# Altium PCB Copy of MacLayout.PcbDoc (part 1 of 2)
Units mil, origin at the board's own origin, x right, y up, seen from the top; angles counter-clockwise.
Board outline 5984.25 x 2047.24 mil, 4 copper layers (Top Layer, Int2 (Sign), Int3 (Sign), Bottom Layer), stack 58.312 mil thick; 135 components, 109 nets, 624 pads, 48 vias.
Unrouted connection lines stored in the file: 144.
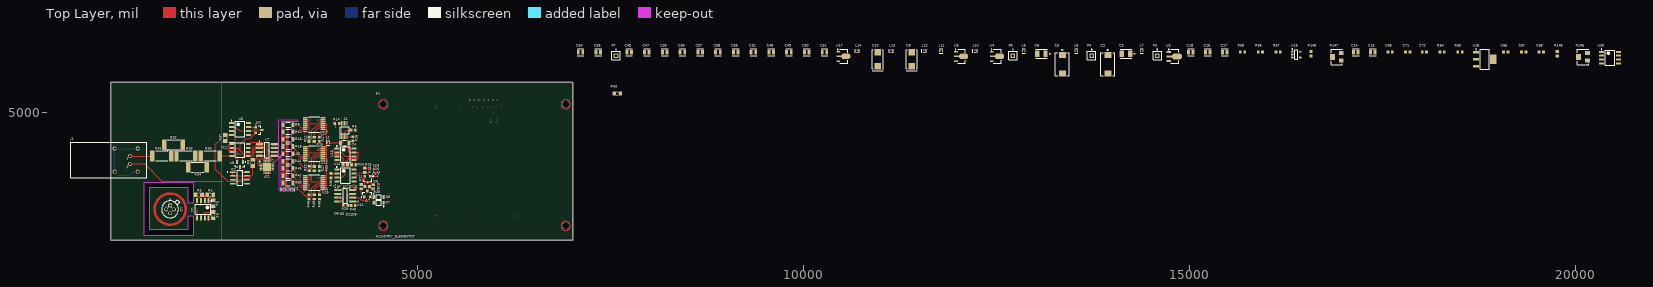
[diagram p0: Top Layer view]
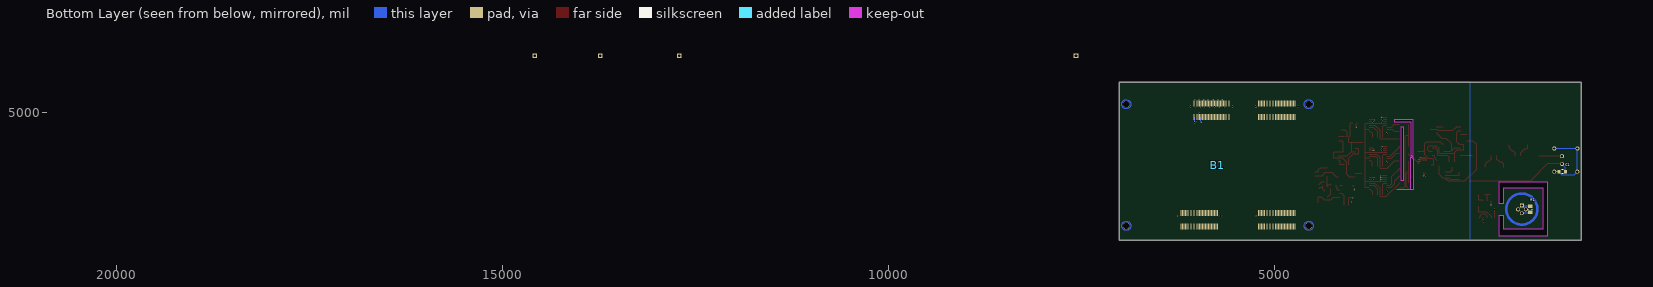
[diagram p1: Bottom Layer view, seen from below]
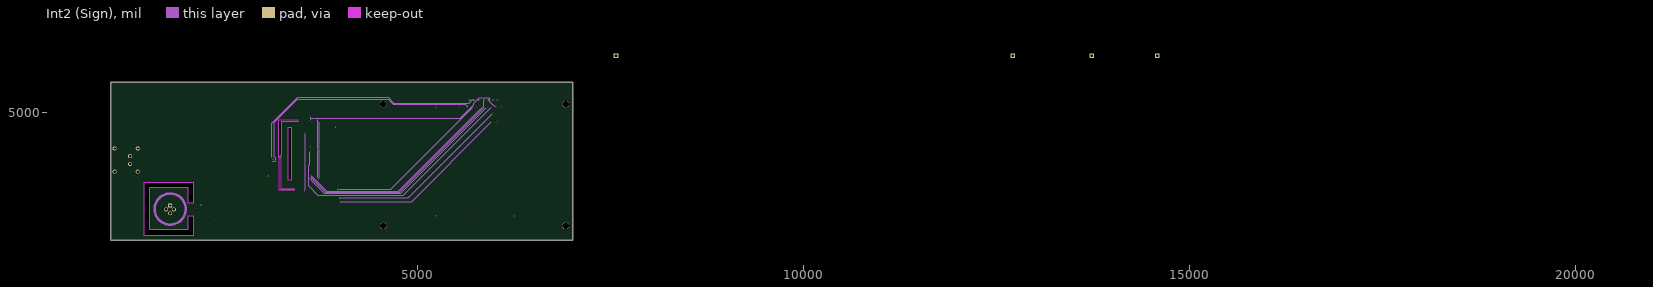
[diagram p2: Int2 (Sign)]
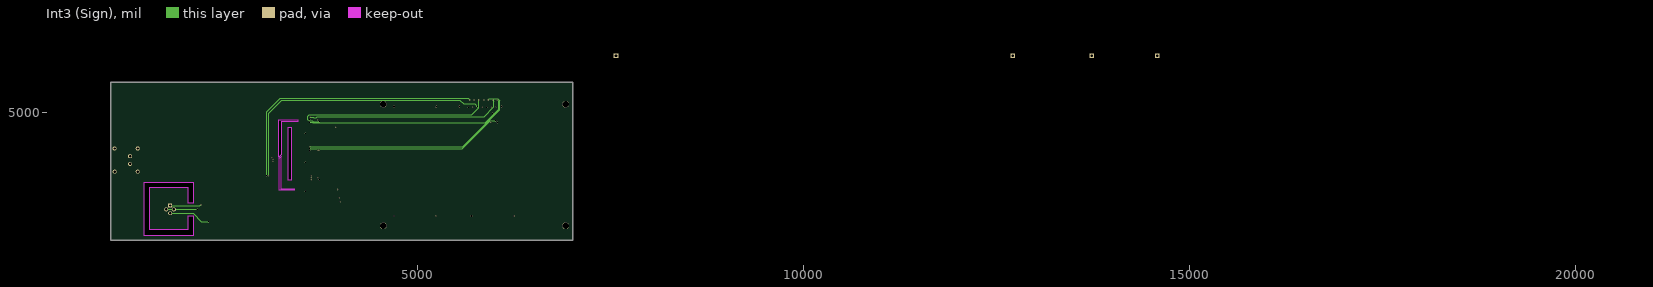
[diagram p3: Int3 (Sign)]

## Layer stack, top to bottom
Top Solder: solder mask 1, SM-001, Dk 4
Top Layer: signal copper 1.378
Dielectric 1: prepreg 2.8, PP-006, Dk 4.1
Dielectric 2: prepreg 2.8, PP-006, Dk 4.1
Dielectric 3: core 18, Core-035, Dk 4.7
Int2 (Sign): signal copper 1.378
Dielectric 4: prepreg 2.8, PP-006, Dk 4.1
Dielectric 5: prepreg 2.8, PP-006, Dk 4.1
Int3 (Sign): signal copper 1.378
Dielectric 6: core 18, Core-035, Dk 4.7
Dielectric 7: prepreg 2.8, PP-006, Dk 4.1
Dielectric 8: prepreg 2.8, PP-006, Dk 4.1
Bottom Layer: signal copper 1.378
Bottom Solder: solder mask 1, SM-001, Dk 4

## Board outline
1023.62,3346.46 7007.87,3346.46 7007.87,5393.7 1023.62,5393.7
cut-out: 3362.71,4809.97 3362.71,4120.2 3322.55,4120.2 3322.55,4809.97
cut-out: 3200.79,4421.26 3200.79,4905.51 3444.88,4905.51 3444.88,4881.89 3232.28,4881.89 3232.28,4452.76
cut-out: 3200.79,4397.64 3200.79,3996.06 3409.17,3996.06 3409.17,4007.87 3232.28,4007.87 3232.28,4429.13
cut-out: 2094.49,3822.83 2027.56,3822.83 2027.56,4027.56 1527.56,4027.56 1527.56,3484.25 2027.56,3484.25 2027.56,3665.35 2094.49,3665.35 2094.49,3405.51 1460.63,3405.51 1460.63,4098.43 2094.49,4098.43

## Design rules (kind name [scope] priority, off if disabled: settings)
Clearance [All] p1: gap=3.15 ignorepadtopadclearanceinfootprint=FALSE except(3.94: Arc-Arc Arc-Track Track-Track)
ComponentClearance [InComponent('B1')] p1: gap=0 collisioncheckmode=3 verticalgap=0 showdistances=FALSE
PlaneConnect [All] p1: planeconnectstyle=Direct reliefexpansion=20 reliefentries=4 reliefconductorwidth=10 reliefairgap=10
PolygonConnect [All] p1: connectstyle=Direct reliefconductorwidth=10 reliefentries=4 polygonreliefangle="90 Angle" airgapwidth=10
RoutingTopology [All] p1: topology=Daisy_Simple
RoutingVias [All] p1: holewidth=11.81 width=19.68 viastyle="Through Hole" minholewidth=11.81 minwidth=19.68 maxholewidth=27.99 maxwidth=50
SolderMaskExpansion [All] p1: expansion=4 istentingtop=FALSE
Width [All] p1: maxlimit=19.68 minlimit=3.94 preferedwidth=10
27 further rules are at their usual default settings.

## Classes and differential pairs
component class U_Vref: R1 R2 R3 R4 R5 U1 U2
component class U_PSU: C2 C3 C5 C6 C8 C10 C14 C15 C16 C17 C18 C32 C39 C45 C47 C48 C49 C50 C51 C54 C55 C56 C57 C58 C59 C66 C67 C68 C69 C71 C72 L7 L8 L9 L10 L11 L12 L13 L14 P3 P4 P5 P7 R54 R55 R56 R57 R58 R145 R146 R147 R148 U3 U4 U5 U17 U18 U19 U30
component class U_Frontend: C1 IC1 J1 Q1 Q2 R8 R31 R32 R33 R34 R35 R37 R43 U6 U7 U8
component class U_FPGA: B1
component class U_ADC_Core: C4 D5 D6 D7 D8 D9 D10 D11 D12 IC2 L1 L2 L3 Q6 Q7 R6 R9 R10 R12 R13 R14 R15 R16 R17 R18 R20 R22 R23 R24 R25 R26 R27 R28 R29 R30 R36 R40 R44 R45 R47 R48 R49 R50 S1 SS U10 U11 U12 U13 U14 U15

## Components (designator, comment, footprint, x,y, rotation, side; value= is the part's Value field where it differs from the comment)
B1 "ALCHITRY_ELEMENTNT" ELEMENT_NO_TOP 7015.75,5204.72 r180 top
C1 "CGA3E2X7R1H104K080AA" FP-CGA3E-0_3-0_1-IPC_A 1271.65,4232.28 r180 bottom
C2 "T491D106K025AT" FP-T491D-MFG 13940,5625 r90 top
C3 "T491B106K016AT" FP-T491B106K016AT-MFG 14175,5760 r0 top
C4 "C1206C331J5GACTU" FP-C1206C-EB-MFG 4055.12,4606.3 r180 top value="330 pF"
C5 "T491D106K025AT" FP-T491D-MFG 13350,5625 r90 top
C6 "T491B106K016AT" FP-T491B106K016AT-MFG 13080,5760 r0 top
C8 "T491C106K010AT" KEMT-T491-C_L 11400,5690 r90 top
C10 "T491C106K010AT" KEMT-T491-C_L 10960,5690 r90 top
C14 "100nF" FP-C0805C-DN-MFG 17150,5780 r0 top value="0.10 μF"
C15 "100nF" FP-C0805C-DN-MFG 17370,5780 r0 top value="0.10 μF"
C16 "100nF" FP-C0805C-DN-MFG 15235,5780 r0 top value="0.10 μF"
C17 "100nF" FP-C0805C-DN-MFG 15455,5780 r0 top value="0.10 μF"
C18 "100nF" FP-C0805C-DN-MFG 15015,5780 r0 top value="0.10 μF"
C32 "10nF" FP-C0805C-DN-MFG 9350,5780 r0 top value="0.10 μF"
C39 "10nF" FP-C0805C-DN-MFG 8200,5780 r0 top value="0.10 μF"
C45 "100nF" FP-C0805C-DN-MFG 7740,5780 r0 top value="0.10 μF"
C47 "100nF" FP-C0805C-DN-MFG 7970,5780 r0 top value="0.10 μF"
C48 "100nF" FP-C0805C-DN-MFG 9580,5780 r0 top value="0.10 μF"
C49 "100nF" FP-C0805C-DN-MFG 9810,5780 r0 top value="0.10 μF"
C50 "100nF" FP-C0805C-DN-MFG 10040,5780 r0 top value="0.10 μF"
C51 "100nF" FP-C0805C-DN-MFG 10270,5780 r0 top value="0.10 μF"
C54 "100nF" FP-C0805C-DN-MFG 7110,5780 r0 top value="0.10 μF"
C55 "100nF" FP-C0805C-DN-MFG 7340,5780 r0 top value="0.10 μF"
C56 "100nF" FP-C0805C-DN-MFG 8430,5780 r0 top value="0.10 μF"
C57 "100nF" FP-C0805C-DN-MFG 8660,5780 r0 top value="0.10 μF"
C58 "100nF" FP-C0805C-DN-MFG 8890,5780 r0 top value="0.10 μF"
C59 "100nF" FP-C0805C-DN-MFG 9120,5780 r0 top value="0.10 μF"
C66 "GRM188R71H103KA01D" CAPC1608X90X35ML10T15 19095,5785 r0 top
C67 "GRM188R71H103KA01D" CAPC1608X90X35ML10T15 19325,5785 r0 top
C68 "GRM188R71H103KA01D" CAPC1608X90X35ML10T15 19555,5785 r0 top
C69 "GRM188R71H103KA01D" CAPC1608X90X35ML10T15 17595,5785 r0 top
C71 "GRM188R71H103KA01D" CAPC1608X90X35ML10T15 17825,5785 r0 top
C72 "GRM188R71H103KA01D" CAPC1608X90X35ML10T15 18040,5785 r0 top
D5 "BAS716" ONSC-SOD-523-2-502-01_V 4018.11,4047.24 r180 top
D6 "BAS716" ONSC-SOD-523-2-502-01_V 3939.37,4047.24 r180 top
D7 "MMSZ4680T1G" ONSC-SOD-123-2-425-04_V 4496.06,3830.71 r180 top
D8 "MMSZ4680T1G" ONSC-SOD-123-2-425-04_V 4496.06,3905.51 r0 top
D9 "BAS716" ONSC-SOD-523-2-502-01_V 4177.17,4047.24 r180 top
D10 "BAS716" ONSC-SOD-523-2-502-01_V 4479.02,4201.29 r270 top
D11 "BAS716" ONSC-SOD-523-2-502-01_V 4096.85,4047.24 r180 top
D12 "BAS716" ONSC-SOD-523-2-502-01_V 4433.07,4200.79 r90 top
IC1 "JFE2140DR" SOIC127P600X175-8N 2699.6,4514.13 r0 top
IC2 "TMUX7234RRQR" QFN50P400X400X80-21N-D 3048.6,4294.79 r0 top
J1 "EPG.0B.302.HLN" EPG.0B.302.HLN 1225.59,4383.07 r180 top
L1 "LQW15ANR10J00D" FP-LQW15AN_00-W0_5-0_1-MFG 3381.61,4002.1 r270 top
L2 "LQW15ANR10J00D" FP-LQW15AN_00-W0_5-0_1-MFG 3840.63,4606.3 r0 top
L3 "LQW15ANR10J00D" FP-LQW15AN_00-W0_5-0_1-MFG 3263.5,4002.1 r90 top
L7 "LQW15ANR10J00D" FP-LQW15AN_00-W0_5-0_1-MFG 14380,5795 r0 top
L8 "LQW15ANR10J00D" FP-LQW15AN_00-W0_5-0_1-MFG 13530,5795 r0 top
L9 "LQW15ANR10J00D" FP-LQW15AN_00-W0_5-0_1-MFG 12850,5795 r0 top
L10 "LQW15ANR10J00D" FP-LQW15AN_00-W0_5-0_1-MFG 12220,5795 r90 top
L11 "LQW15ANR10J00D" FP-LQW15AN_00-W0_5-0_1-MFG 11780,5795 r0 top
L12 "LQW15ANR10J00D" FP-LQW15AN_00-W0_5-0_1-MFG 11560,5795 r90 top
L13 "LQW15ANR10J00D" FP-LQW15AN_00-W0_5-0_1-MFG 11135,5795 r90 top
L14 "LQW15ANR10J00D" FP-LQW15AN_00-W0_5-0_1-MFG 10695,5795 r90 top
P3 "Plug" PIN1 14580,5735 r0 top
P4 "Plug" PIN1 13730,5735 r0 top
P5 "Plug" PIN1 12710,5735 r0 top
P7 "Plug" PIN1 7570,5735 r0 top
Q1 "SSM2212RZ-R7" FP-R-8-IPC_C 2698.98,4153.24 r0 top
Q2 "MMBF4391LT1G" ONSC-SOT-23-3-318-08_V 2945.04,4773.16 r0 top
Q6 "MMBFJ309LT1G" ONSC-SOT-23-3-318-08_V 4351.38,4133.86 r270 top
Q7 "MMBFJ175LT1G" ONSC-SOT-23-3-318-08_V 4349.02,3943.09 r90 top
R1 "7K5" RESC2013X60X35ML10T20 1688.03,3744.96 r270 bottom
R2 "9K" RESC2013X60X35ML10T20 2313.99,3932.92 r0 top
R3 "20K" RESC2013X60X35ML10T20 2354.46,3670.87 r270 top
R4 "20K" RESC2013X60X35ML10T20 2353.34,3825.63 r270 top
R5 "20K" RESC2013X60X35ML10T20 2168.11,3933.63 r180 top
R6 "ERJ-3GEYJ202V" RESC1608X55X30ML15T15 4165.35,4771.65 r180 top
R8 "1K" RESC2013X60X35ML10T20 2866.14,4346.46 r270 top
R9 "10K" FP-RC1206-MFG 3322.55,4842.64 r0 top value=0Ω
R10 "40K" FP-RC1206-MFG 3322.55,4748.16 r0 top value=0Ω
R12 "ERJ-3GEYJ202V" RESC1608X55X30ML15T15 3595.02,4651.07 r270 top
R13 "640R" FP-RC1206-MFG 3322.55,4653.67 r0 top value=0Ω
R14 "ERJ-3GEYJ202V" RESC1608X55X30ML15T15 3955.71,4858.27 r180 top
R15 "ERJ-3GEYJ202V" RESC1608X55X30ML15T15 3729.97,4651.07 r270 top
R16 "ERJ-3GEYJ202V" RESC1608X55X30ML15T15 4165.35,4657.48 r90 top
R17 "ERJ-3GEYJ202V" RESC1608X55X30ML15T15 3661.95,4651.07 r270 top
R18 "6.24M" FP-RC1206-MFG 3322.55,4559.18 r0 top value=0Ω
R20 "ERJ-3GEYJ202V" RESC1608X55X30ML15T15 3597.77,4273.23 r270 top
R22 "ERJ-3GEYJ202V" RESC1608X55X30ML15T15 4270.84,4039.33 r270 top
R23 "ERJ-3GEYJ202V" RESC1608X55X30ML15T15 3729.94,4272.21 r270 top
R24 "ERJ-3GEYJ202V" RESC1608X55X30ML15T15 4063.98,4322.83 r180 top
R25 "ERJ-3GEYJ202V" RESC1608X55X30ML15T15 4172.81,4322.4 r180 top
R26 "ERJ-3EKF4220V" RESC1608X55X30ML15T15 4347.44,4039.37 r0 top
R27 "ERJ-3GEYJ202V" RESC1608X55X30ML15T15 3662.75,4272.21 r270 top
R28 "ERJ-3GEYJ202V" RESC1608X55X30ML15T15 4426.08,4038.41 r270 top
R29 "ERJ-3GEYJ202V" RESC1608X55X30ML15T15 4066.93,3795.28 r180 top
R30 "ERJ-3GEYJ202V" RESC1608X55X30ML15T15 3877.95,4181.1 r90 top
R31 "10K 2512" FP-CRCW2512-e3-MFG 1685.04,4437.01 r0 top
R32 "10K 2512" FP-CRCW2512-e3-MFG 1838.58,4582.68 r0 top
R33 "10K 2512" FP-CRCW2512-e3-MFG 2000,4437.01 r0 top
R34 "10K 2512" FP-CRCW2512-e3-MFG 2149.61,4291.34 r0 top
R35 "10K 2512" FP-CRCW2512-e3-MFG 2314.96,4437.01 r0 top
R36 "ERJ-3GEYJ202V" RESC1608X55X30ML15T15 4314.96,4251.97 r270 top
R37 "1K" RESC2013X60X35ML10T20 2507.87,4669.29 r270 top
R40 "ERJ-3GEYJ202V" RESC1608X55X30ML15T15 4165.35,3795.28 r180 top
R43 "1K" RESC2013X60X35ML10T20 7585,5245 r0 top
R44 "2.56M" FP-RC1206-MFG 3322.55,4370.2 r0 top value=0Ω
R45 "160K" FP-RC1206-MFG 3322.55,4275.72 r0 top value=0Ω
R46 "ERJ-3GEYJ202V" RESC1608X55X30ML15T15 3595.02,3905.28 r270 top
R47 "40K" FP-RC1206-MFG 3322.55,4181.23 r0 top value=0Ω
R48 "ERJ-3GEYJ202V" RESC1608X55X30ML15T15 3729.97,3905.28 r270 top
R49 "ERJ-3GEYJ202V" RESC1608X55X30ML15T15 3661.95,3905.28 r270 top
R50 "10K" FP-RC1206-MFG 3322.55,4086.74 r0 top value=0Ω
R54 "ERJ-3GEYJ202V" RESC1608X55X30ML15T15 18270,5785 r0 top
R55 "ERJ-3GEYJ202V" RESC1608X55X30ML15T15 18500,5785 r0 top
R56 "ERJ-3GEYJ202V" RESC1608X55X30ML15T15 15915,5785 r0 top
R57 "ERJ-3GEYJ202V" RESC1608X55X30ML15T15 16145,5785 r0 top
R58 "ERJ-3GEYJ202V" RESC1608X55X30ML15T15 15685,5785 r0 top
R145 "3224W-1-102E" FP-3224W-MFG 20095,5720 r0 top value=1kΩ
R146 "ERJ-3GEYJ202V" RESC1608X55X30ML15T15 19760,5760 r90 top
R147 "3224W-1-102E" FP-3224W-MFG 16905,5720 r0 top value=1kΩ
R148 "ERJ-3GEYJ202V" RESC1608X55X30ML15T15 16570,5760 r90 top
S1 "TMUX6122DGSR" SOP50P490X110-10N 4056.1,4772.52 r90 top
SS "50K" FP-RC1206-MFG 3322.55,4464.69 r0 top value=0Ω (schematic designator R19)
U1 "OPA2140AIDR" D0008A_M 2219.67,3745.9 r270 top
U2 "LM399AH#PBF" FP-H-4-05-08-1341-MFG 1794.33,3744.96 r90 top
U3 "L78L15ABUTR" SOT-89_N 14805,5725 r0 top
U4 "L79L15ACUTR" SOT-89_L 12505,5725 r0 top
U5 "L78L05ABUTR" SOT-89_L 12040,5725 r0 top
U6 "OPA140AID" D0008A_M 2699.6,4785.99 r0 top
U7 "LT1128CS8#PBF" LT-S8-8_M 3049.37,4514.13 r0 top
U8 "Vishay 2K Matched Resistor Network" MAXM-U3+2_L 2699.6,4325.72 r270 top
U10 "TMUX1133PWR" FP-PW0016A-MFG 3660.47,4842.64 r180 top
U11 "TMUX1133PWR" FP-PW0016A-MFG 3660.47,4466.32 r180 top
U12 "TL3016CDR" FP-D0008A-IPC_A 4062.46,3921.46 r180 top
U13 "OPA2140AIDR" D0008A_M 4064.78,4456.82 r0 top
U14 "OPA140AID" D0008A_M 4064.78,4183.79 r0 top
U15 "TMUX1133PWR" FP-PW0016A-MFG 3660.47,4090 r180 top
U17 "L79L05ABUTR" SOT-89_L 10515,5725 r0 top
U18 "LD1117S25TR" SOT-223_L 18820,5690 r0 top
U19 "TPS72325DBVT" DBV0005A_L 16380,5750 r0 top
U30 "OPA2140AIDR" D0008A_M 20445,5710 r0 top

## Footprints (in the part's own frame and the unit in brackets; to place one, negate y for a bottom-side part, rotate by r counter-clockwise, add the part's x,y. Pads: shape width x height; smd on the part's side, far side on the other; paste and mask are expansions set on the pad)
CAPC1608X90X35ML10T15 [mm] "Chip Capacitor, 2-Leads, Body 1.7x0.9mm, IPC Low Density"
  rect 0.95x1.05 smd: 1(-0.725,0) 2(0.725,0)
  body extent -0.85,-0.45 0.85,0.45, height 0.9
D0008A_M [mm] "SOIC, 8-Leads, Body 5x4mm, Pitch 1.27mm, IPC Low Density"
  rrect15% 1.65x0.65 smd: 1(-2.825,1.905) 2(-2.825,0.635) 3(-2.825,-0.635) 4(-2.825,-1.905) 5(2.825,-1.905) 6(2.825,-0.635) 7(2.825,0.635) 8(2.825,1.905)
  silkscreen extent -2.95,-2.5 1.6,2.91, body extent -3,-2.45 3,2.45, height 1.63
DBV0005A_L [mm] "SOT23, 5-Leads, Body 3.05x1.75mm, Pitch 0.95mm, IPC High Density"
  rrect18% 0.8x0.55 smd: 1(-1.275,0.95) 2(-1.275,0) 3(-1.275,-0.95) 4(1.275,-0.95) 5(1.275,0.95)
  silkscreen extent -1.4,-1.55 0.5,1.9, body extent -1.42,-1.46 1.42,1.46, height 1.08
ELEMENT_NO_TOP [mm]
  rect 0.25x2 smd far side: AB_1(20.5,38.3) AB_2(21,38.3) AB_3(21.5,38.3) AB_4(22,38.3) AB_5(22.5,38.3) AB_6(23,38.3) AB_7(23.5,38.3) AB_8(24,38.3) AB_9(24.5,38.3) AB_10(25,38.3) AB_11(25.5,38.3) AB_12(26,38.3) AB_13(26.5,38.3) AB_14(27,38.3) AB_15(27.5,38.3) AB_16(28,38.3) AB_17(28.5,38.3) AB_18(29,38.3) AB_19(29.5,38.3) AB_20(30,38.3) AB_21(30.5,38.3) AB_22(31,38.3) AB_23(31.5,38.3) AB_24(32,38.3) AB_25(32.5,38.3) AB_26(32.5,42.7) AB_27(32,42.7) AB_28(31.5,42.7) AB_29(31,42.7) AB_30(30.5,42.7) AB_31(30,42.7) AB_32(29.5,42.7) AB_33(29,42.7) AB_34(28.5,42.7) AB_35(28,42.7) AB_36(27.5,42.7) AB_37(27,42.7) AB_38(26.5,42.7) AB_39(26,42.7) AB_40(25.5,42.7) AB_41(25,42.7) AB_42(24.5,42.7) AB_43(24,42.7) AB_44(23.5,42.7) AB_45(23,42.7) AB_46(22.5,42.7) AB_47(22,42.7) AB_48(21.5,42.7) AB_49(21,42.7) AB_50(20.5,42.7) BB_1(46,38.3) BB_2(46.5,38.3) BB_3(47,38.3) BB_4(47.5,38.3) BB_5(48,38.3) BB_6(48.5,38.3) BB_7(49,38.3) BB_8(49.5,38.3) BB_9(50,38.3) BB_10(50.5,38.3) BB_11(51,38.3) BB_12(51.5,38.3) BB_13(52,38.3) BB_14(52.5,38.3) BB_15(53,38.3) BB_16(53.5,38.3) BB_17(54,38.3) BB_18(54.5,38.3) BB_19(55,38.3) BB_20(55.5,38.3) BB_21(56,38.3) BB_22(56.5,38.3) BB_23(57,38.3) BB_24(57.5,38.3) BB_25(58,38.3) BB_26(58,42.7) BB_27(57.5,42.7) BB_28(57,42.7) BB_29(56.5,42.7) BB_30(56,42.7) BB_31(55.5,42.7) BB_32(55,42.7) BB_33(54.5,42.7) BB_34(54,42.7) BB_35(53.5,42.7) BB_36(53,42.7) BB_37(52.5,42.7) BB_38(52,42.7) BB_39(51.5,42.7) BB_40(51,42.7) BB_41(50.5,42.7) BB_42(50,42.7) BB_43(49.5,42.7) BB_44(49,42.7) BB_45(48.5,42.7) BB_46(48,42.7) BB_47(47.5,42.7) BB_48(47,42.7) BB_49(46.5,42.7) BB_50(46,42.7) CB_1(24.5,2.3) CB_2(25,2.3) CB_3(25.5,2.3) CB_4(26,2.3) CB_5(26.5,2.3) CB_6(27,2.3) CB_7(27.5,2.3) CB_8(28,2.3) CB_9(28.5,2.3) CB_10(29,2.3) CB_11(29.5,2.3) CB_12(30,2.3) CB_13(30.5,2.3) CB_14(31,2.3) CB_15(31.5,2.3) CB_16(32,2.3) CB_17(32.5,2.3) CB_18(33,2.3) CB_19(33.5,2.3) CB_20(34,2.3) CB_21(34.5,2.3) CB_22(35,2.3) CB_23(35.5,2.3) CB_24(36,2.3) CB_25(36.5,2.3) CB_26(36.5,6.7) CB_27(36,6.7) CB_28(35.5,6.7) CB_29(35,6.7) CB_30(34.5,6.7) CB_31(34,6.7) CB_32(33.5,6.7) CB_33(33,6.7) CB_34(32.5,6.7) CB_35(32,6.7) CB_36(31.5,6.7) CB_37(31,6.7) CB_38(30.5,6.7) CB_39(30,6.7) CB_40(29.5,6.7) CB_41(29,6.7) CB_42(28.5,6.7) CB_43(28,6.7) CB_44(27.5,6.7) CB_45(27,6.7) CB_46(26.5,6.7) CB_47(26,6.7) CB_48(25.5,6.7) CB_49(25,6.7) CB_50(24.5,6.7) DB_1(46,2.3) DB_2(46.5,2.3) DB_3(47,2.3) DB_4(47.5,2.3) DB_5(48,2.3) DB_6(48.5,2.3) DB_7(49,2.3) DB_8(49.5,2.3) DB_9(50,2.3) DB_10(50.5,2.3) DB_11(51,2.3) DB_12(51.5,2.3) DB_13(52,2.3) DB_14(52.5,2.3) DB_15(53,2.3) DB_16(53.5,2.3) DB_17(54,2.3) DB_18(54.5,2.3) DB_19(55,2.3) DB_20(55.5,2.3) DB_21(56,2.3) DB_22(56.5,2.3) DB_23(57,2.3) DB_24(57.5,2.3) DB_25(58,2.3) DB_26(58,6.7) DB_27(57.5,6.7) DB_28(57,6.7) DB_29(56.5,6.7) DB_30(56,6.7) DB_31(55.5,6.7) DB_32(55,6.7) DB_33(54.5,6.7) DB_34(54,6.7) DB_35(53.5,6.7) DB_36(53,6.7) DB_37(52.5,6.7) DB_38(52,6.7) DB_39(51.5,6.7) DB_40(51,6.7) DB_41(50.5,6.7) DB_42(50,6.7) DB_43(49.5,6.7) DB_44(49,6.7) DB_45(48.5,6.7) DB_46(48,6.7) DB_47(47.5,6.7) DB_48(47,6.7) DB_49(46.5,6.7) DB_50(46,6.7)
  round 2.2 hole 2.2 unplated: MH1(2.5,2.5) MH2(2.5,42.5) MH3(62.5,42.5) MH4(62.5,2.5)
  round 0.55 hole 0.55 unplated: MH5(58.95,39.25) MH6(45.05,39.25) MH7(33.45,39.25) MH8(19.55,39.25) MH9(58.95,3.25) MH10(45.05,3.25) MH11(37.45,3.25) MH12(23.55,3.25)
  Top Layer circle w0.254: c2.5,2.5 r1.5
  Top Layer circle w0.254: c2.5,42.5 r1.5
  Top Layer circle w0.254: c62.5,42.5 r1.5
  Top Layer circle w0.254: c62.5,2.5 r1.5
  Bottom Layer circle w0.254: c62.5,2.5 r1.5
  Bottom Layer circle w0.254: c62.5,42.5 r1.5
  Bottom Layer circle w0.254: c2.5,42.5 r1.5
  Bottom Layer circle w0.254: c2.5,2.5 r1.5
EPG.0B.302.HLN [mil] "Socket, Female, Height 11.7 mm, Through hole"
  round 52 hole 32: 1(-50,-50) 2(-50,50) 4(-150,-150) 5(150,-150) 6(150,150) 7(-150,150)
  silkscreen extent -268,-230 717,231, body extent -259,-230 725,230, height 500
FP-3224W-MFG [mm]
  rect 1.6x1.3 smd paste+0 mask+0: 1(1.45,-1.25) 3(1.45,1.25)
  rect 1.6x2 smd paste+0 mask+0: 2(-1.45,0)
  silkscreen extent -1.88,-2.52 1.88,2.52, body extent -2.35,-2.63 2.35,2.63, height 0.25
FP-C0805C-DN-MFG [mm]
  rect 0.95x1.35 smd paste+0 mask+0: 1(-0.75,0) 2(0.75,0)
  silkscreen extent -1.1,-1.07 1.1,1.07, body extent -1.4,-0.85 1.4,0.85, height 0.25
FP-C1206C-EB-MFG [mm]
  rect 0.95x1.7 smd paste+0 mask+0: 1(-1.4,0) 2(1.4,0)
  silkscreen extent -0.55,-0.9 0.55,0.9, body extent -2,-1 2,1, height 0.25
FP-CGA3E-0_3-0_1-IPC_A [mm]
  rect 0.956x1.206 smd paste+0 mask+0: 1(-1.025,0) 2(1.025,0)
  silkscreen extent -0.25,-0.6 0.25,0.6, body extent -0.8,-0.4 0.8,0.4, height 1.1
FP-CRCW2512-e3-MFG [mm]
  rect 1.45x3.5 smd paste+0 mask+0: 1(-3.1,0) 2(3.1,0)
  silkscreen extent -2,-1.65 2,1.65, body extent -3.92,-1.85 3.93,1.85, height 0.25
FP-D0008A-IPC_A [mil]
  rect 97.21x24.49 smd paste+0 mask+0: 1(-95.02,75)
  rrect100% 97.21x24.49 smd paste+0 mask+0: 2(-95.02,25) 3(-95.02,-25) 4(-95.02,-75) 5(95.02,-75) 6(95.02,-25) 7(95.02,25) 8(95.02,75)
  silkscreen extent -170,-97 27,97, body extent -163,-116 163,116, height 10
FP-H-4-05-08-1341-MFG [mm]
  rect 1.3x1.3 hole 0.8 paste-1000 mask+0: 1(1.27,0)
  round 1.3 hole 0.8 paste-1000 mask+0: 2(0,1.27) 3(-1.27,0) 4(0,-1.27)
  silkscreen extent -2.78,-3.24 3.37,2.78, body extent -2.88,-3.34 3.34,2.88, height 0.25
FP-LQW15AN_00-W0_5-0_1-MFG [mm]
  rect 0.35x0.65 smd paste+0 mask+0: 1(-0.425,0) 2(0.425,0)
  silkscreen extent -0.55,-0.71 0.55,0.7, body extent -0.7,-0.43 0.7,0.43, height 0.25
FP-PW0016A-MFG [mm]
  rrect22% 1.5x0.45 smd paste+0 mask+0: 1(-2.9,2.275) 2(-2.9,1.625) 3(-2.9,0.975) 4(-2.9,0.325) 5(-2.9,-0.325) 6(-2.9,-0.975) 7(-2.9,-1.625) 8(-2.9,-2.275) 9(2.9,-2.275) 10(2.9,-1.625) 11(2.9,-0.975) 12(2.9,-0.325) 13(2.9,0.325) 14(2.9,0.975) 15(2.9,1.625) 16(2.9,2.275)
  silkscreen extent -4.38,-2.55 1.78,2.55, body extent -3.75,-2.8 3.75,2.8, height 0.25
FP-R-8-IPC_C [mil]
  rect 73.78x21.34 smd paste+0 mask+0: 1(-91.18,75)
  rrect100% 73.78x21.34 smd paste+0 mask+0: 2(-91.18,25) 3(-91.18,-25) 4(-91.18,-75) 5(91.18,-75) 6(91.18,-25) 7(91.18,25) 8(91.18,75)
  silkscreen extent -166,-96 35,96, body extent -132,-100 132,100, height 10
FP-RC1206-MFG [mm]
  rect 1x1.5 smd paste+0 mask+0: 1(-1.6,0) 2(1.6,0)
  silkscreen extent -0.72,-0.85 0.72,0.85, body extent -2.2,-0.95 2.2,0.95, height 0.25
FP-T491B106K016AT-MFG [mm]
  rect 1.42x2.13 smd paste+0 mask+0: 1(-1.35,0) 2(1.35,0)
  silkscreen extent -1.85,-1.5 3,1.5, body extent -2.18,-1.62 2.18,1.62, height 0.25
FP-T491D-MFG [mm]
  rect 1.99x2.33 smd paste+0 mask+0: 1(-3.01,0) 2(3.01,0)
  silkscreen extent -3.8,-2.3 5,2.3, body extent -4.13,-2.42 4.13,2.42, height 0.25
KEMT-T491-C_L [mm] "Molded Capacitor, 2-Leads, Body 6.30x3.50mm, IPC High Density"
  rect 2.2x2.15 smd: 1(-2.275,0) 2(2.275,0)
  silkscreen extent -3.87,-1.75 3.15,1.75, body extent -3.15,-1.75 3.15,1.75, height 2.79
LT-S8-8_M [mm] "SOIC, 8-Leads, Body 4.9x3.9mm, Pitch 1.27mm, IPC Low Density"
  oval 2.5x0.7 smd: 1(-2.45,1.905) 2(-2.45,0.635) 3(-2.45,-0.635) 4(-2.45,-1.905) 5(2.45,-1.905) 6(2.45,-0.635) 7(2.45,0.635) 8(2.45,1.905)
  silkscreen extent -2.57,-2.5 0.8,2.93, body extent -2,-2.5 2,2.5, height 1.76
MAXM-U3+2_L [mm] "SOT23, 3-Leads, Body 2.92x1.3mm, Pitch 0.95mm, IPC High Density"
  rect 1.3x0.6 smd: 1(-0.85,0.95) 2(-0.85,-0.95) 3(0.85,0)
  silkscreen extent -0.97,-1.5 0.7,1.93, body extent -0.7,-1.52 0.7,1.52, height 1.12
ONSC-SOD-123-2-425-04_V [mm] "SOD, 2-Leads, Body 2.69x1.6mm"
  rect 0.91x1.22 smd: 1(-1.635,0) 2(1.635,0)
  silkscreen extent -1.76,-0.8 0.78,1.28, body extent -1.35,-0.8 1.35,0.8, height 1.35
ONSC-SOD-523-2-502-01_V [mm] "SOD, 2-Leads, Body 1.2x0.8mm"
  rect 0.48x0.4 smd: 1(-0.66,0) 2(0.66,0)
  silkscreen extent -0.75,-0.4 0.07,0.65, body extent -0.6,-0.4 0.6,0.4, height 0.7
ONSC-SOT-23-3-318-08_V [mm] "SOT23, 3-Leads, Body 2.92x1.3mm, Pitch 0.95mm"
  rect 0.9x0.8 smd: 1(-1,0.95) 2(-1,-0.95) 3(1,0)
  silkscreen extent -1.12,-1.46 0.65,2.02, body extent -0.65,-1.46 0.65,1.46, height 1.11
PIN1 [mm] "Connector; Plug"
  rect 1.5x1.5 hole 0.9: 1(0,0)
  silkscreen extent -1.4,-1.4 1.4,2.17
QFN50P400X400X80-21N-D [mm]
  rect 0.85x0.3 smd: 1(-1.95,1) 2(-1.95,0.5) 3(-1.95,0) 4(-1.95,-0.5) 5(-1.95,-1) 11(1.95,-1) 12(1.95,-0.5) 13(1.95,0) 14(1.95,0.5) 15(1.95,1)
  rect 0.3x0.85 smd: 6(-1,-1.95) 7(-0.5,-1.95) 8(0,-1.95) 9(0.5,-1.95) 10(1,-1.95) 16(1,1.95) 17(0.5,1.95) 18(0,1.95) 19(-0.5,1.95) 20(-1,1.95)
  rect 2.6x2.6 smd: 21(0,0)
  silkscreen extent -2.5,1.63 -2.25,1.87, body extent -2,-2 2,2, height 0.8
RESC1608X55X30ML15T15 [mm] "Chip Resistor, 2-Leads, Body 1.60x0.80mm, IPC Low Density"
  rect 0.9x1.05 smd: 1(-0.725,0) 2(0.725,0)
  body extent -0.87,-0.48 0.87,0.48, height 0.55
RESC2013X60X35ML10T20 [mm] "Chip Resistor, 2-Leads, Body 2.1x1.35mm, IPC Low Density"
  rect 1.2x1.45 smd: 1(-1,0) 2(1,0)
  silkscreen extent -0.1,-0.63 0.1,0.63, body extent -1.05,-0.68 1.05,0.67, height 0.6
SOIC127P600X175-8N [mm]
  rect 1.525x0.65 smd: 1(-2.712,1.905) 2(-2.712,0.635) 3(-2.712,-0.635) 4(-2.712,-1.905) 5(2.712,-1.905) 6(2.712,-0.635) 7(2.712,0.635) 8(2.712,1.905)
  silkscreen extent -3.47,-2.45 1.6,2.58, body extent -3,-2.45 3,2.45, height 1.75
SOP50P490X110-10N [mm]
  rect 1.4x0.3 smd: 1(-2.2,1) 2(-2.2,0.5) 3(-2.2,0) 4(-2.2,-0.5) 5(-2.2,-1) 6(2.2,-1) 7(2.2,-0.5) 8(2.2,0) 9(2.2,0.5) 10(2.2,1)
  silkscreen extent -2.9,-1.5 1.15,1.5, body extent -2.46,-1.5 2.46,1.5, height 1.1
SOT-89_L [mm] "SOT89, 3-Leads, Body 4.5x2.4 mm, Pitch 1.5mm, Lead Span 4.1mm, IPC High Density"
  rect 1.2x0.5 smd: 1(-1.7,1.5) 3(-1.7,-1.5)
  rect 1.6x0.5 smd: 2(-1.5,0)
  oct 3x1.8 smd: 2(0.8,0)
  silkscreen extent -1.97,-2.3 1.4,2.42, body extent -1.2,-2.3 1.4,2.3, height 1.6
SOT-89_N [mm] "SOT89, 3-Leads, Body 4.5x2.4 mm, Pitch 1.5mm, Lead Span 4.1mm, IPC Medium Density"
  rect 1.4x0.6 smd: 1(-1.9,1.5) 3(-1.9,-1.5)
  rect 1.8x0.6 smd: 2(-1.7,0)
  oct 3.2x1.9 smd: 2(0.8,0)
  silkscreen extent -2.07,-2.3 1.3,2.47, body extent -1.3,-2.3 1.3,2.3, height 1.6
SOT-223_L [mm] "SOT223, 4-Leads, Body 6.5x3.5mm, Pitch 2.3mm, Lead Span 7mm, IPC High Density"
  rect 2.1x0.9 smd: 1(-2.85,2.3) 2(-2.85,0) 3(-2.85,-2.3)
  rect 2.1x3.2 smd: 4(2.85,0)
  silkscreen extent -2.97,-3.35 1.5,3.42, body extent -1.85,-3.35 1.85,3.35, height 1.8

## Part data
B1: Package=ELEMENT_NO_TOP, DeviceName=NT, DeviceSetName=ALCHITRY_ELEMENT, GateName_1=A, GateName_2=B, GateName_3=C, GateName_4=D, LibraryName=alchitry_elements, SymbolName_1=FE25-2, SymbolName_2=FE25-2, SymbolName_3=FE25-2, SymbolName_4=FE25-2
C1: library part CMP-2000-07546-2, "Cap Ceramic 100nF 50V X7R 10% Pad SMD 0603 +125°C Automotive T/R", Capacitance=100nF, Case Code (Imperial)=0603, Case Code (Metric)=1608, Dielectric=X7R, Max Operating Temperature=125°C, Min Operating Temperature=-55°C, Package Quantity=1, Ratings=AEC-Q200, Tolerance=10%, Voltage=50V, Case/Package=0603, Composition=Ceramic, Depth=0.8mm, Height=0.8mm, Lead Free="Lead Free", Length=1.6mm, Mount="Surface Mount", Packaging="Tape and Reel", Radiation Hardening=No, REACH SVHC="No SVHC", Termination=SMD/SMT, Thickness=0.035inch, Voltage Rating=50V, Voltage Rating (DC)=50V, Weight=7.1E-05oz, Width=0.8mm
C2 C5: library part CMP-2000-07200-2, "CAP TANT 10UF 10% 25V 2917", Capacitance=10uF, Case Code (Imperial)=2917, Case Code (Metric)=7343, Dielectric Material=Tantalum, ESR (Equivalent Series Resistance)=1R, Leakage Current=2.5uA, Max Operating Temperature=125°C, Min Operating Temperature=-55°C, Package Quantity=1, Ripple Current=387mA, Tolerance=20%, Voltage=25V, Case/Package=2917, Depth=4.3mm, Dissipation Factor=6%, Features="General Purpose", Height=2.8mm, Height - Seated (Max)=0.122inch, Lead Free="Lead Free", Length=7.3mm, Life (Hours)=2000Hour, Mount="Surface Mount", Number of Pins=2, Packaging="Tape and Reel", Polarity=Polar, Radiation Hardening=No, REACH SVHC="No SVHC", Termination=SMD/SMT, Voltage Rating=25V, Voltage Rating (DC)=25V, Width=4.3mm
C3 C6: library part CMP-03017-000012-1, "CAP TANT 10UF 10% 16V 1411", Capacitance=10uF, Case Code (Imperial)=1411, Case Code (Metric)=3528, Dielectric Material=Tantalum, ESR (Equivalent Series Resistance)=2.8R, Leakage Current=1.6uA, Max Operating Temperature=125°C, Min Operating Temperature=-55°C, Package Quantity=1, Ripple Current=174mA, Tolerance=10%, Voltage=16V, Case/Package=1411, Depth=2.8mm, Dissipation Factor=6%, Features="General Purpose", Height=1.9mm, Height - Seated (Max)=0.083inch, Lead Free="Lead Free", Lead Pitch=1.9mm, Length=3.5mm, Life (Hours)=2000Hour, Mount="Surface Mount", Number of Pins=2, Packaging="Tape and Reel", Polarity=Polar, REACH SVHC="No SVHC", RoHS Compliant=Yes, Termination=SMD/SMT, Voltage Rating=16V, Voltage Rating (DC)=16V, Width=0.11inch
C4: library part CMP-03020-027730-1, "CAP CER 330PF 50V 5% NP0 1206", Capacitance="330 pF", Manufacturer=KEMET, Package=C1206C-EB, Temperature="-55°C to +150°C", Temperature Characteristic=C0G, Temperature Coefficient=15%, Temperature Range High=+150°C, Temperature Range Low=-55°C, Tolerance=0.05, Voltage Rating="50 V", Automotive=Yes, Automotive Grade="Grade 0", Category=Cap, ComponentLink2Description=Datasheet, ComponentLink2URL=https://content.kemet.com/datasheets/KEM_C1007_X8R_ULTRA_150C_SMD.pdf, Device Class L1="Passive Components", Device Class L2=Capacitors, Device Class L3="Ceramic Capacitors", Digikey Description="CAP CER 330PF 50V 5% NP0 1206", Height=0.88mm, Ipc Land Pattern Name=CAPC320160X78, Lead Free=Yes, Manufacturer Part Number=C1206C331J5GACTU, Material=Ceramic, Mouser Description="Multilayer Ceramic Capacitors MLCC - SMD/SMT 50volts 330pF C0G 5%", Octopart=https://octopart.com/c1206c331j5gactu-kemet-3859988, RoHS=TRUE
C8 C10: library part CMP-2000-07196-1, "Tantalum Surface Mount Capacitor, 10 uF, +/- 10%, 10 V, -55 to 125 degC, 2-Pin SMD, RoHS, Tape and Reel", Capacitance=10µF, Capacitance Tolerance=±10%, Capacitor Case Style=2312^6032Metric], Capacitor Terminals=SMD, Manufacturer=Kemet, Operating Temperature Range=-55°Cto+125°C, Package Description="2-Pin Surface Mount Device, Body 6 x 3.2 mm", Package Reference=T491-C, Voltage Rating=10V, Datasheet URL=http://www.kemet.com/Lists/ProductCatalog/Attachments/254/KEM_T2005_T491.pdf, Datasheet Version=06/2016, ESR=1.8ohm, Lead Spacing=–, Manufacturer URL=http://www.kemet.com/, Mounting Technology=SurfaceMount, MSL=MSL1-Unlimited, SVHC=–
C14 C15 C16 C17 C18 C32 C39 C45 C47 C48 C49 C50 C51 C54 C55 C56 C57 C58 C59: library part CMP-2007-00279-2, "CAP CER 0.1UF 50V X7R 0805", Capacitance="0.10 μF", Manufacturer=KEMET, Manufacturer Part Number=C0805C104K5RACTU, Package=C0805C-DN, Temperature="-55°C to +125°C", Temperature Characteristic=X7R, Temperature Coefficient=30ppm/°C, Temperature Range High=+125°C, Temperature Range Low=-55°C, Tolerance=0.1, Voltage Rating="50 V", Automotive=No, Category=Cap, ComponentLink2Description=Datasheet, ComponentLink2URL=https://content.kemet.com/datasheets/KEM_C1003_C0G_SMD.pdf, Device Class L1="Passive Components", Device Class L2=Capacitors, Device Class L3="Ceramic Capacitors", Digikey Description="CAP CER 0.1UF 50V X7R 0805", Height=0.88mm, Ipc Land Pattern Name=CAPC200125X78, Lead Free=Yes, Material=Ceramic, Mouser Description="Cap Ceramic 0.1uF 50V X7R 10% SMD 2.0 x 1.2 mm 125 C Paper T/R", Octopart=https://octopart.com/c0805c104k5ractu-kemet-143926, RoHS=TRUE
C66 C67 C68 C69 C71 C72: library part CMP-2100-03642-1, "Chip Capacitor, 10 nF, +/- 10%, 50 V, -55 to 125 degC, 0603 (1608 Metric), RoHS, Tape and Reel", Capacitance=10nF, Case Code (Imperial)=0603, Case Code (Metric)=1608, Dielectric=X7R, Dielectric Material=Ceramic, Insulation Resistance=10GR, Manufacturer=Murata, Max Operating Temperature=125degC, Min Operating Temperature=-55degC, Package Description="2-Pin Surface Mount Device, Body 1.6 x 0.8 mm", Package Quantity=1, Tolerance=10%, Voltage=50V, Case/Package=0603, Datasheet URL=http://search.murata.co.jp/Ceramy/image/img/A01X/G101/ENG/GRM188R71H103KA01-01.pdf, Datasheet Version=42401.0, Depth=0.8mm, Height=0.8mm, Lead Free=LeadFree, Length=1.6mm, Manufacturer URL=http://www.murata.com/, Material=Ceramic, Mount=SurfaceMount, Number of Pins=2, Package Reference=0603, Packaging=TapeandReel, REACH SVHC=Unknown, RoHSCompliant=True, Termination=SMD/SMT, Thickness=0.035inch, Voltage Rating=50V, Voltage Rating (DC)=50V, Width=0.031inch
D5 D6 D9 D10 D11 D12: library part CMP-1055-00490-1, "Schottky Barrier Diode, 2-Pin SOD-523, Pb-Free, Tape and Reel", Manufacturer="On Semiconductor", PartNumber=BAT54XV2T5G, ComponentLink1Description="Manufacturer URL", ComponentLink1URL=http://www.onsemi.com/, ComponentLink2Description=Datasheet, ComponentLink2URL=http://www.onsemi.cn/pub_link/Collateral/BAT54XV2T1-D.PDF, ComponentLink3Description="Package Specification", ComponentLink3URL=http://www.onsemi.com/pub_link/Collateral/502-01.PDF, Configuration=Single, DatasheetVersion="Rev. 8", IFSM Max (A)=0.6, Mounting Technology="Surface Mount", PackageDescription="2-Pin SOD, Body 1.2 x 0.8 mm", PackageReference=SOD-523-2-502-01, PackageVersion="Rev. E, 09/2010", Packing="Tape and Reel", RoHS=TRUE, trr Max (ns)=5
D7 D8: library part CMP-1060-00604-1, "Zener Voltage Regulator, 500 mW, 2-Pin SOD-123, Pb-Free, Tape and Reel", Manufacturer="On Semiconductor", ComponentLink1Description="Manufacturer URL", ComponentLink1URL=http://www.onsemi.com/, ComponentLink2Description=Datasheet, ComponentLink2URL=http://www.onsemi.com/pub_link/Collateral/MMSZ4678T1-D.PDF, ComponentLink3Description="Package Specification", ComponentLink3URL=http://www.onsemi.com/pub_link/Collateral/425-04.PDF, DatasheetVersion="Rev. 9", Mounting Technology="Surface Mount", P Max (W)=0.5, PackageDescription="2-Pin SOD, Body 1.6 x 2.69 mm", PackageReference=SOD-123-2-425-04, PackageVersion="Rev. G, 10/2009", Packing="Tape and Reel", PartNumber=MMSZ4680T1G, RoHS=Pb-Free, VZ Typ (V)=2.2
IC1: "Integrated Circuit", Manufacturer_Name="Texas Instruments", Mouser Part Number=595-JFE2140DR, Datasheet Link=https://www.ti.com/lit/ds/symlink/jfe2140.pdf?ts=1633964558921, Height=1.75mm, Manufacturer_Part_Number=JFE2140DR, Mouser Price/Stock=https://www.mouser.co.uk/ProductDetail/Texas-Instruments/JFE2140DR?qs=A6eO%252BMLsxmQVeRIGZCabaw%3D%3D
IC2: "Integrated Circuit", Manufacturer_Name="Texas Instruments", Mouser Part Number=595-TMUX7234RRQR, Datasheet Link=https://www.ti.com/lit/gpn/tmux7234, Height=0.8mm, Manufacturer_Part_Number=TMUX7234RRQR, Mouser Price/Stock=https://www.mouser.co.uk/ProductDetail/Texas-Instruments/TMUX7234RRQR?qs=pBJMDPsKWf2ane92Zx3aRA%3D%3D
J1: library part CMP-1505-00295-1, "Elbow receptacle for printed circuit (solder or screw fixing), Key (G), 0B series, Multipole Type with 2 Contacts", Manufacturer=LEMO, Rated Current(A)=6, AWG=22, ComponentLink1Description="Manufacturer URL", ComponentLink1URL=http://www.lemo.com, ComponentLink2Description=Datasheet, ComponentLink2URL=http://intra.lemo.ch/catalog/ROW/UK_English/unipole_multipole.pdf, Contact Diameter="0.9 mm", DatasheetVersion=Jun-14, Number of contacts=2, PackageDescription="Elbow receptacle for printed circuit (solder or screw fixing), Key(G) for Printed Circuit", PackageReference=EPG.0B.302.HLN, PartNumber=EPG.0B.302.HLN
L1 L2 L3 L7 L8 L9 L10 L11 L12 L13 L14: library part CMP-06042-005024-1, "Wire Wound RF Inductor 100nH ±5% 120mA 2.52Ω 0402 (1005)", Case Code (Imperial)=0402, Case Code (Metric)=1005, Current Rating=120mA, DC Resistance (DCR)=2.52R, Inductance=100nH, Inductance Tolerance=5%, Max Operating Temperature=125°C, Min Operating Temperature=-55°C, Package Quantity=10000, Self Resonant Frequency=1.5GHz, Test Frequency=100MHz, Case/Package=0402, Core Material=Air, DC Current=120mA, Depth=0.6mm, Height=0.5mm, Lead Free="Lead Free", Length=1mm, Max DC Current=120mA, Military Standard=Not, Mount="Surface Mount", Number of Pins=2, Packaging="Tape and Reel", Radiation Hardening=No, REACH SVHC="No SVHC", Shielding=Unshielded, Termination=SMD/SMT, Tolerance=5%, Weight=2.8E-05oz, Width=0.5mm
Q1: library part CMP-09180-000002-1, "TRANS 2NPN 40V 0.02A 8SOIC", Case/Package=SOIC, Collector Base Voltage (VCBO)=40V, Collector Emitter Breakdown Voltage=45V, Collector-emitter Voltage-Max=800mV, Frequency=200MHz, Max Collector Current=20mA, Max Operating Temperature=85°C, Max Power Dissipation=500mW, Min Operating Temperature=-40°C, Package Quantity=1000, Transition Frequency=450MHz, Collector Emitter Voltage (VCEO)=40V, Contact Plating=Tin, Element Configuration=Dual, Lead Free="Contains Lead", Max Breakdown Voltage=40V, Mount="Surface Mount", Number of Elements=2, Number of Pins=8, Packaging="Tape and Reel", Polarity=NPN, Radiation Hardening=No, RoHS Compliant=Yes, Series=SSM2212
Q2: library part CMP-1062-00030-1, "JFET Switching Transistor, N-Channel, 3-Pin SOT-23, Pb-Free, Tape and Reel", Manufacturer="On Semiconductor", Channel Polarity="N Channel", Ciss Max (pF)=14, ComponentLink1Description="Manufacturer URL", ComponentLink1URL=http://www.onsemi.com/, ComponentLink2Description=Datasheet, ComponentLink2URL=http://www.onsemi.com/pub_link/Collateral/MMBF4391LT1-D.PDF, ComponentLink3Description="Package Specification", ComponentLink3URL=http://www.onsemi.cn/pub_link/Collateral/318-08.PDF, Crss Max (pF)=3.5, DatasheetVersion="Rev. 10", IDSS Max (uA)=150000, IDSS Min (uA)=50000, Mounting Technology="Surface Mount", PackageDescription="3-Pin Small Outline Transistor, Body 2.92 x 1.3 mm, Pitch 0.95 mm", PackageReference=SOT-23-3-318-08, PackageVersion="Rev. AP, 11/2009", Packing="Tape and Reel", PartNumber=MMBF4391LT1G, RoHS=Pb-Free, V(BR)GSS Min (V)=30
Q6: library part CMP-1062-00028-1, "JFET - VHF / UHF Amplifier Transistor, N-Channel, 3-Pin SOT-23, Pb-Free, Tape and Reel", Manufacturer="On Semiconductor", Channel Polarity="N Channel", Ciss Max (pF)=5, ComponentLink1Description="Manufacturer URL", ComponentLink1URL=http://www.onsemi.com/, ComponentLink2Description=Datasheet, ComponentLink2URL=http://www.onsemi.cn/pub_link/Collateral/MMBFJ309LT1-D.PDF, ComponentLink3Description="Package Specification", ComponentLink3URL=http://www.onsemi.cn/pub_link/Collateral/318-08.PDF, Crss Max (pF)=2.5, DatasheetVersion="Rev. 7", IDSS Max (uA)=30000, IDSS Min (uA)=12000, Mounting Technology="Surface Mount", PackageDescription="3-Pin Small Outline Transistor, Body 2.92 x 1.3 mm, Pitch 0.95 mm", PackageReference=SOT-23-3-318-08, PackageVersion="Rev. AP, 11/2009", Packing="Tape and Reel", PartNumber=MMBFJ309LT1G, RoHS=Pb-Free, V(BR)GSS Min (V)=25
Q7: library part CMP-1062-00050-1, "JFET Chopper, P-Channel - Depletion, 3-Pin SOT-23, Pb-Free, Tape and Reel", Manufacturer="On Semiconductor", Channel Polarity="P Channel", Ciss Max (pF)=11, ComponentLink1Description="Manufacturer URL", ComponentLink1URL=http://www.onsemi.com/, ComponentLink2Description=Datasheet, ComponentLink2URL=http://www.onsemi.com/pub_link/Collateral/MMBFJ175LT1-D.PDF, ComponentLink3Description="Package Specification", ComponentLink3URL=http://www.onsemi.cn/pub_link/Collateral/318-08.PDF, Crss Max (pF)=5.5, DatasheetVersion="Rev. 5", IDSS Max (uA)=60000, IDSS Min (uA)=7000, Mounting Technology="Surface Mount", PackageDescription="3-Pin Small Outline Transistor, Body 2.92 x 1.3 mm, Pitch 0.95 mm", PackageReference=SOT-23-3-318-08, PackageVersion="Rev. AP, 11/2009", Packing="Tape and Reel", PartNumber=MMBFJ175LT1G, RoHS=Pb-Free, V(BR)GSS Min (V)=30
R1 R2 R3 R4 R5 R8 R37 R43: library part CMP-2100-03671-1, "Chip Resistor, 1 KOhm, +/- 1%, 125 mW, -55 to 155 degC, 0805 (2012 Metric), RoHS, Tape and Reel", Case Code (Imperial)=0805, Case Code (Metric)=2012, Manufacturer=Yageo, Max Operating Temperature=155degC, Max Power Dissipation=125mW, Min Operating Temperature=-55degC, Package Description="2-Pin Surface Mounted Device, Body 2 x 1.25 mm", Package Quantity=1, Resistance=1KOhm, Temperature Coefficient=100ppm/degreesC, Tolerance=1%, Voltage Rating=150V, Case/Package=0805, Composition=ThickFilm, Datasheet URL=http://www.yageo.com/NewPortal/yageodocoutput?fileName=/pdf/R-Chip/PYu-RC_Group_51_RoHS_L_5.pdf, Datasheet Version="Rev. 5, 10/2016", Depth=1.25mm, Height=0.024inch, Lead Free=LeadFree, Length=0.079inch, Manufacturer URL=http://www.yageo.com/, Military Standard=Not, Number of Pins=2, Number of Terminations=2, Package Reference=0805, Packaging=TapeandReel, Power Rating=125mW, REACH SVHC=Unknown, RoHSCompliant=true, Termination=SMD/SMT, Voltage Rating (DC)=150V, Width=0.049inch
R6 R12 R14 R15 R16 R17 R20 R22 R23 R24 R25 R27 R28 R29 R30 R36 R40 R46 R48 R49 R54 R55 R56 R57 R58 R146 R148: library part CMP-2000-00741-1, Manufacturer=Panasonic, Part Number=ERJ-3GEYJ202V
R9 R10 R13 R18 R44 R45 R47 R50 SS: library part CMP-2100-03681-2, "RES SMD 0 OHM JUMPER 1/4W 1206", Manufacturer=YAGEO, Manufacturer Part Number=RC1206JR-070RL, Package=RC1206, Power Rating=0.25W, Resistance=0Ω, Temperature="-55°C to +155°C", Temperature Coefficient=300ppm/°C, Temperature Range High=+155°C, Temperature Range Low=-55°C, Tolerance=5%, Voltage Rating=200V, Automotive=No, Category=Res, ComponentLink2Description=Datasheet, ComponentLink2URL=https://www.yageo.com/upload/media/product/productsearch/datasheet/rchip/PYu-RC_Group_51_RoHS_L_10.pdf, Composition="Thick Film", Device Class L1="Passive Components", Device Class L2=Resistors, Device Class L3="Chip SMD Resistors", Digikey Description="RES SMD 0 OHM JUMPER 1/4W 1206", Footprint Url=https://www.yageo.com/upload/website/yageo_PYu-R_Mount_10_19050818_343.pdf, Height=0.65mm, Ipc Land Pattern Name=RESC310160X55, Lead Free=Yes, Mouser Description="Resistor: thick film; SMD; 1206; 0O; 0.25W; ±5%; -55÷155°C", Octopart=https://octopart.com/rc1206jr-070rl-yageo-40025601, RoHS=TRUE, Series=RC
R26: library part CMP-2000-00493-1, Manufacturer=Panasonic, Part Number=ERJ-3EKF4220V
R31 R32 R33 R34 R35: library part CMP-02407-004199-1, "RES Thick Film, 100kΩ, 1%, 1W, 100ppm/°C, 2512", Case Code (Imperial)=2512, Case Code (Metric)=6432, Max Operating Temperature=155°C, Max Power Dissipation=1W, Min Operating Temperature=-55°C, Package Quantity=2000, Resistance=100kR, Temperature Coefficient=100ppm/°C, Tolerance=1%, Voltage Rating=500V, Case/Package=2512, Composition="Thick Film", Contact Plating=Tin, Depth=3.15mm, Features="Automotive AEC-Q200", Height=0.6mm, Lead Free="Lead Free", Length=6.3mm, Military Standard=Not, Number of Pins=2, Number of Terminations=2, Packaging="Tape and Reel", Power Rating=1W, Radiation Hardening=No, Termination=SMD/SMT, Voltage Rating (DC)=500V, Weight=0.001429oz, Width=3.15mm
R145 R147: library part CMP-07234-000003-1, "TRIMMER 1K OHM 0.25W J LEAD TOP", Manufacturer=Bourns, Package=3224W, Power Rating=0.25W, Resistance=1kΩ, Temperature="-65°C to +150°C", Temperature Coefficient=100ppm/°C, Temperature Range High=+150°C, Temperature Range Low=-65°C, Tolerance=10%, Voltage Rating=300V, Automotive=No, Category=Res, ComponentLink2Description=Datasheet, ComponentLink2URL=https://www.bourns.com/docs/Product-Datasheets/3224.pdf, Composition=Cermet, Device Class L1="Passive Components", Device Class L2=Resistors, Device Class L3="Variable Resistors and Potentiometers", Digikey Description="TRIMMER 1K OHM 0.25W J LEAD TOP", Height=5.55mm, Lead Free=Yes, Manufacturer Part Number=3224W-1-102E, Mouser Description="Trimmer Resistors - SMD 4mm 1Kohms 10% Square Cermet Sealed", Octopart=https://octopart.com/3224w-1-102e-bourns-23105, RoHS=TRUE, Series=3224, Standoff Height=0.2mm
S1: "Switch", Manufacturer_Name="Texas Instruments", Mouser Part Number=595-TMUX6122DGSR, Arrow Part Number=TMUX6122DGSR, Arrow Price/Stock=https://www.arrow.com/en/products/tmux6122dgsr/texas-instruments, Datasheet Link=http://www.ti.com/lit/gpn/TMUX6122, Height=1.1mm, Manufacturer_Part_Number=TMUX6122DGSR, Mouser Price/Stock=https://www.mouser.co.uk/ProductDetail/Texas-Instruments/TMUX6122DGSR?qs=l7cgNqFNU1g7U5Em%252B8JhAQ%3D%3D
U1 U13 U30: library part CMP-0272-00256-3, "11 MHz, Precision, Low Noise, Rail-to-Rail Output, JFET Operational Amplifier, 4.5 to 36 V, -40 to 125 degC, 8-pin SOIC (D8), Green (RoHS & no Sb/Br)", Manufacturer="Texas Instruments", Rating=Catalog, Total Supply Voltage(Max)(+5V is 5, +/-5V is 10)=36, Total Supply Voltage(Min)(+5V is 5, +/-5V is 10)=4.5, CMRR(Min)(dB)=126, Code_JEDEC=MS-012, ComponentLink1Description="Manufacturer URL", ComponentLink1URL=http://www.ti.com/, ComponentLink2Description=Datasheet, ComponentLink2URL=http://www.ti.com/lit/ds/symlink/opa2140.pdf, ComponentLink3Description="Package Specification", ComponentLink3URL=http://www.ti.com/litv/pdf/msoi002j, DatasheetVersion=SBOS498A, Eco-Plan="Green (RoHS & no Sb/Br)", GBW(Typ)(MHz)=11, IIB(Max)(pA)=10, Iq per channel(Max)(mA)=2, Mounting Technology="Surface Mount", Number of Channels=2, Offset Drift(Typ)(uV/C)=0.35, PackageDescription="8-Pin Plastic Small Outline, Body 4.9 x 3.9 mm, Pitch 1.27 mm", PackageReference=D0008A, PackageVersion="4040047-3/M, 06/2011", Packing="LARGE T&R", PartNumber=OPA2140AIDR, Slew Rate(Typ)(V/us)=20, Sub Family="High Supply Voltage Amplifier (>=30V), Low Input Bias Current Amp (<=10pA), Low Noise Amp (<=10nV/rtHz), Low Offset Voltage Amplifier (<=500uV), Precision Amplifier", Vio (25C)(Max)(mV)=0.12